# Altium PCB ATSAMD20E16_devBoard.PcbDoc
Units mm, origin at the board's own origin, x right, y up, seen from the top; angles counter-clockwise.
Board outline 26.71 x 26.71 mm, 2 copper layers (Top, Bottom), stack 1.571 mm thick; 10 components, 34 nets, 82 pads, 0 vias.
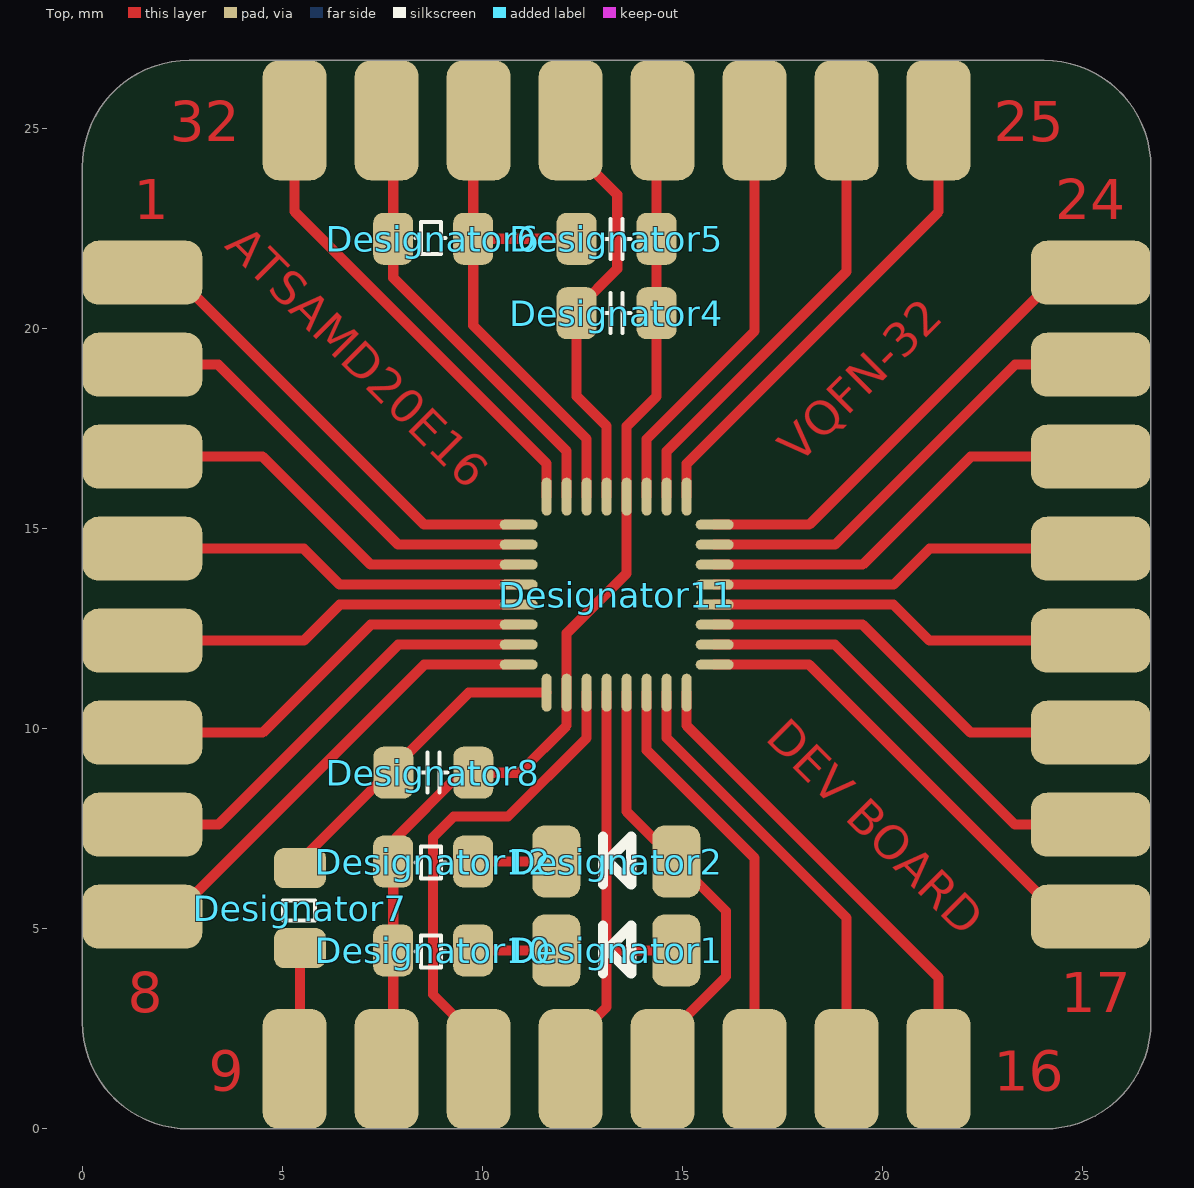
[diagram p0: Top view]
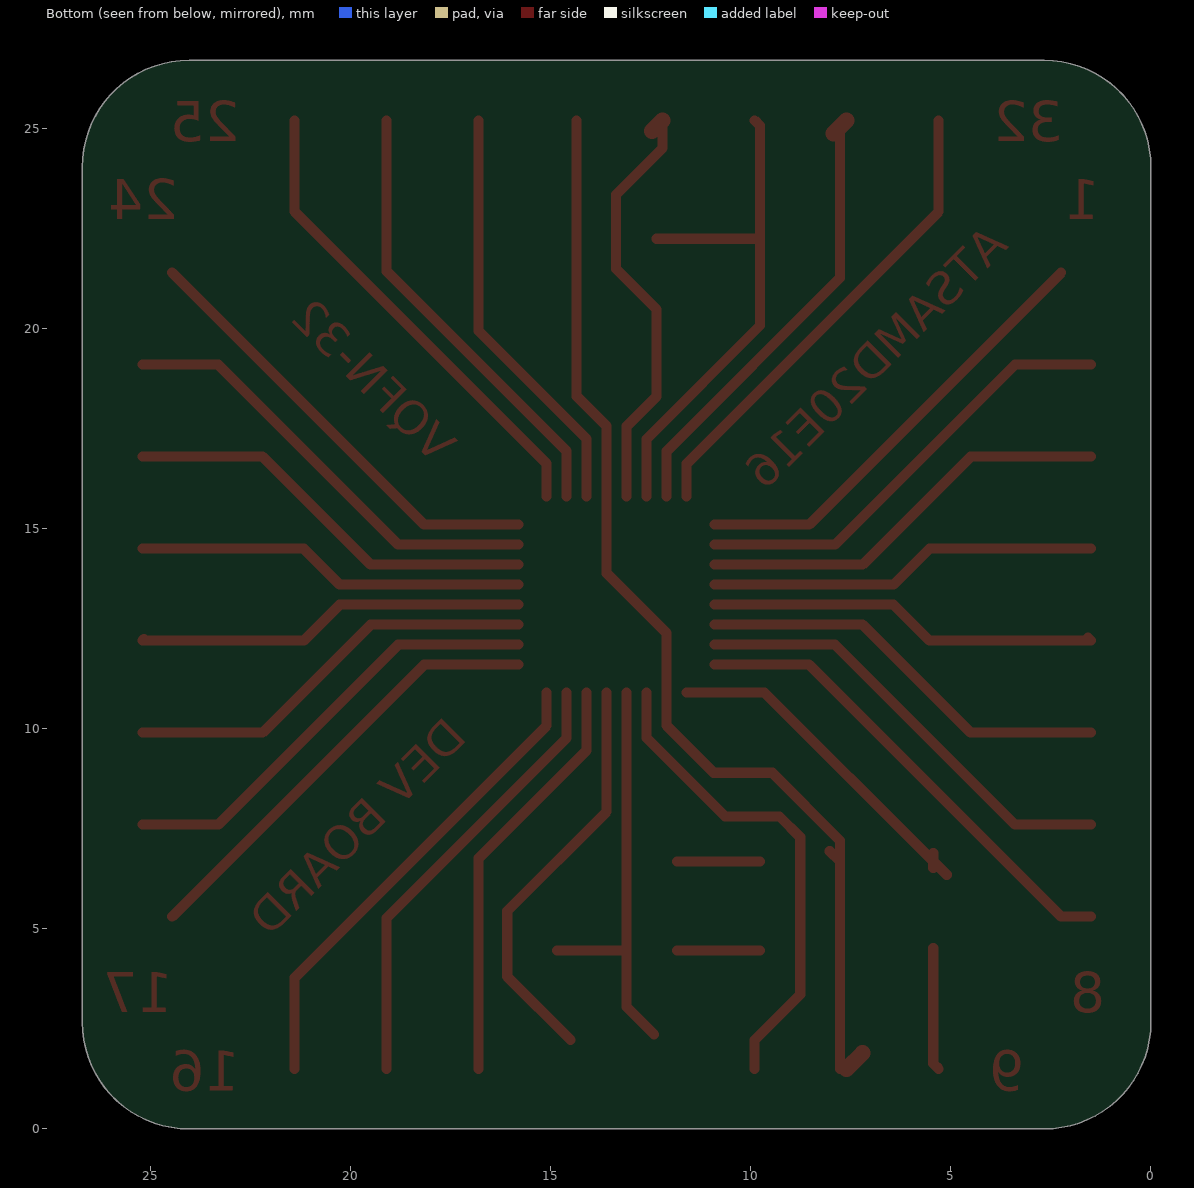
[diagram p1: Bottom view, seen from below]
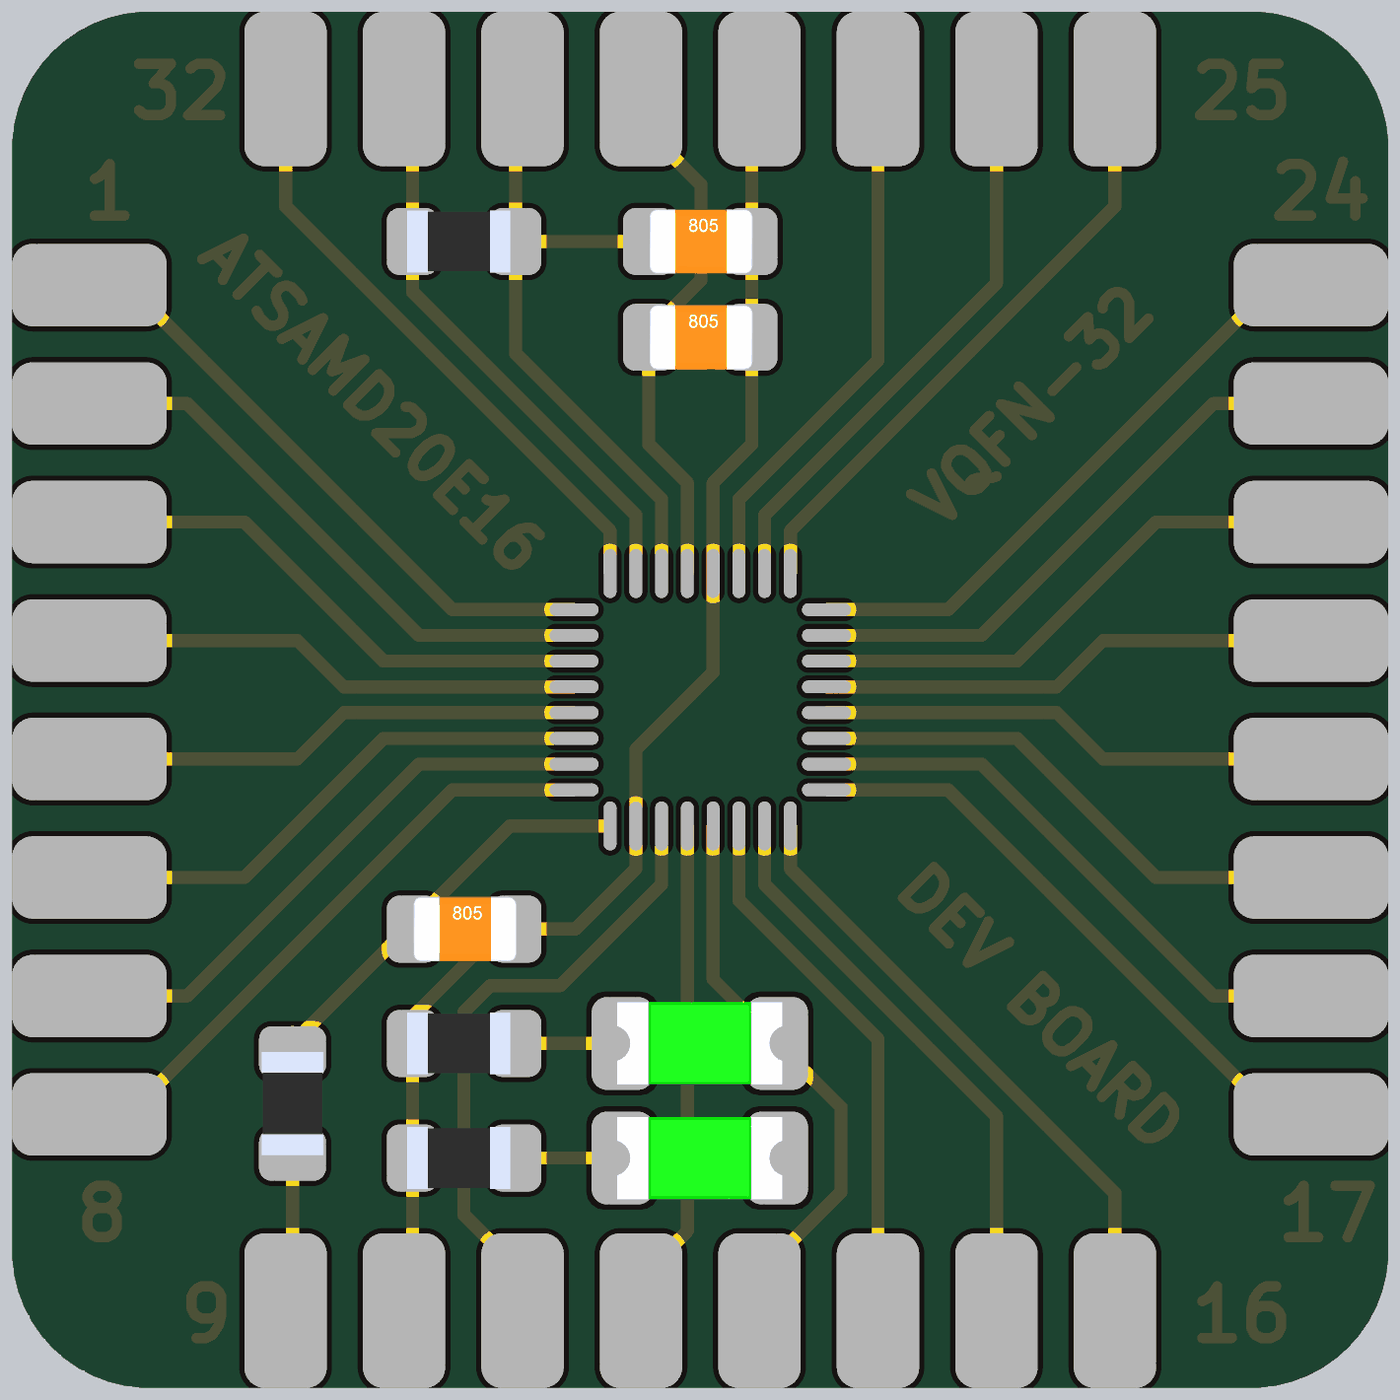
[diagram p2: 3D render of the assembled board from above, using the file's embedded part models]

## Layer stack, top to bottom
Top Solder: solder mask 0.0102, Solder Resist, Dk 3.5
Top: signal copper 0.0356
Dielectric1: core 1.5, FR-4, Dk 4.8
Bottom: signal copper 0.0356
Bottom Solder: solder mask 0.0102, Solder Resist, Dk 3.5

## Board outline
0,2.667 ccw(c2.667,2.667) 2.667,0 24.047,0 ccw(c24.047,2.667) 26.714,2.667 26.714,24.047 ccw(c24.047,24.047) 24.047,26.714 2.667,26.714 ccw(c2.667,24.047) 0,24.047

## Design rules (kind name [scope] priority, off if disabled: settings)
Clearance Clearance_1 [InPolygon] p1: gap=1 ignorepadtopadclearanceinfootprint=FALSE except(0: Arc-Hole Track-Hole SMDPad-Hole THPad-Hole Via-Hole Fill-Hole Poly-Hole Region-Hole Text-Hole)
Clearance [All] p2: gap=0.1 ignorepadtopadclearanceinfootprint=FALSE except(0: Arc-Hole Track-Hole SMDPad-Hole THPad-Hole Via-Hole Fill-Hole Poly-Hole Region-Hole Text-Hole)
PlaneClearance [All] p1: clearance=0.1
PolygonConnect [All] p1: connectstyle=Direct reliefconductorwidth=0.254 reliefentries=4 polygonreliefangle="90 Angle" airgapwidth=0.254
RoutingVias [All] p1: holewidth=0.711 width=1.27 viastyle="Through Hole" minholewidth=0.711 minwidth=1.27 maxholewidth=5 maxwidth=5
SilkToSolderMaskClearance SilkscreenOverComponentPads [IsPad] p1: minsilkscreentomaskgap=0.254 clearancetoexposedcopper=TRUE
SolderMaskExpansion [All] p1: expansion=0.102 istentingtop=FALSE
Width [All] p1: maxlimit=10 minlimit=0.254 preferedwidth=0.254
28 further rules are at their usual default settings.

## Components (designator, comment, footprint, x,y, rotation, side; value= is the part's Value field where it differs from the comment)
Designator1 "Comment" "LED 1206 GREEN" 14.849,4.461 r180 top
Designator2 "Comment" "LED 1206 GREEN" 14.849,6.685 r180 top
Designator4 "Comment" CAP0805 12.357,20.392 r0 top
Designator5 "Comment" CAP0805 12.357,22.253 r0 top
Designator6 "Comment" RES0805 7.772,22.253 r0 top
Designator7 "Comment" IND0805 5.442,4.519 r90 top
Designator8 "Comment" CAP0805 7.775,8.905 r0 top
Designator10 "Comment" RES0805 7.772,4.461 r0 top
Designator11 "Comment" ATML-QFN-32_M 13.357,13.357 r0 top
Designator12 "Comment" RES0805 7.772,6.685 r0 top

## Footprints (in the part's own frame and the unit in brackets; to place one, negate y for a bottom-side part, rotate by r counter-clockwise, add the part's x,y. Pads: shape width x height; smd on the part's side, far side on the other; paste and mask are expansions set on the pad)
ATML-QFN-32_M [mm] "QFN, 32-Leads, Body 5x5mm, Pitch 0.5mm, Thermal Pad 3.6x3.6mm, IPC Low Density"
  oval 0.95x0.25 smd: 1(-2.45,1.75) 2(-2.45,1.25) 3(-2.45,0.75) 4(-2.45,0.25) 5(-2.45,-0.25) 6(-2.45,-0.75) 7(-2.45,-1.25) 8(-2.45,-1.75) 17(2.45,-1.75) 18(2.45,-1.25) 19(2.45,-0.75) 20(2.45,-0.25) 21(2.45,0.25) 22(2.45,0.75) 23(2.45,1.25) 24(2.45,1.75)
  oval 0.25x0.95 smd: 9(-1.75,-2.45) 10(-1.25,-2.45) 11(-0.75,-2.45) 12(-0.25,-2.45) 13(0.25,-2.45) 14(0.75,-2.45) 15(1.25,-2.45) 16(1.75,-2.45) 25(1.75,2.45) 26(1.25,2.45) 27(0.75,2.45) 28(0.25,2.45) 29(-0.25,2.45) 30(-0.75,2.45) 31(-1.25,2.45) 32(-1.75,2.45)
  body extent -2.5,-2.5 2.5,2.5, height 1
CAP0805 [mm]
  rrect50% 1x1.3 smd: 1(0,0) 2(2,0)
  silkscreen extent 0.65,-0.5 1.35,0.5, body extent 0.02,-0.63 2.02,0.62, height 0.78
IND0805 [mm]
  rrect50% 1x1.3 smd: 1(0,0) 2(2,0)
  silkscreen extent 0.69,-0.38 1.19,0.42, body extent 0,-0.6 2,0.6, height 0.5
"LED 1206 GREEN" [mm]
  rrect50% 1.2x1.8 smd mask-25.4: 1(0,0) 2(3,0)
  silkscreen extent 1.13,-0.63 1.83,0.58, body extent -0.1,-0.8 3.1,0.8, height 1.1
RES0805 [mm]
  rrect50% 1x1.3 smd: 1(0,0) 2(2,0)
  silkscreen extent 0.56,-0.38 1.31,0.42, body extent -0.1,-0.6 1.9,0.6, height 0.5

## Free pads (board coordinates)
  rrect50% 3x1.6 smd: 1(1.5,21.407) 2(1.5,19.107) 3(1.5,16.807) 4(1.5,14.507) 5(1.5,12.207) 6(1.5,9.907) 7(1.5,7.607) 8(1.5,5.307) 17(25.214,5.307) 18(25.214,7.607) 19(25.214,9.907) 20(25.214,12.207) 21(25.214,14.507) 22(25.214,16.807) 23(25.214,19.107) 24(25.214,21.407)
  rrect50% 1.6x3 smd: 5(5.307,25.214) 9(5.307,1.5) 10(7.607,1.5) 11(9.907,1.5) 12(12.207,1.5) 13(14.507,1.5) 14(16.807,1.5) 15(19.107,1.5) 16(21.407,1.5) 25(21.407,25.214) 26(19.107,25.214) 27(16.807,25.214) 28(14.507,25.214) 29(12.207,25.214) 30(9.907,25.214) 31(7.607,25.214)

## Nets (pads, with @x,y where several pads share a name; then routed paths per layer and width w, separated by ;. In a path a pad name is that pad's centre, name@x,y a point inside that pad or via, vN(x,y) a via of type N, cw(c..) or ccw(c..) an arc to the next point about the centre after c; other vN are vias at no path point)
GND: Designator4.2 Designator5.2 Designator8.2 Designator10.1 Designator11.10 Designator11.28 Designator12.1 pad.10 pad.28 | length 28.2
  Top w0.254: pad.10@7.772,1.5 Designator10.1 Designator12.1 ; Designator12.1@8.028,6.941 Designator12.1 ; pad.28@14.357,25.214 Designator5.2 Designator4.2 14.357,18.315 13.607,17.565 Designator11.28 13.607,13.891 12.107,12.391 Designator11.10 12.107,10.081 10.931,8.905 Designator8.2 9.468,8.904 7.772,7.208 Designator12.1
  Top w0.4: pad.10@7.209,1.898 pad.10
LED_0: Designator1.2 Designator10.2 | length 2.1
  Top w0.254: Designator10.2 Designator1.2
LED_1: Designator2.2 Designator12.2 | length 2.1
  Top w0.254: Designator12.2 Designator2.2
PA00: Designator11.1 pad.1 | length 11.3
  Top w0.254: pad.1@2.245,21.407 8.545,15.107 Designator11.1
PA01: Designator11.2 pad.2 | length 11.3
  Top w0.254: pad.2 3.398,19.107 7.898,14.607 Designator11.2
PA02: Designator11.3 pad.3 | length 10.5
  Top w0.254: pad.3 4.507,16.807 7.207,14.107 Designator11.3
PA03: Designator11.4 pad.4 | length 9.8
  Top w0.254: pad.4 5.536,14.507 6.436,13.607 Designator11.4
PA04: Designator11.5 pad.5@1.5,12.207 | length 9.9
  Top w0.254: pad.5@1.573,12.28 1.5,12.207 5.536,12.207 6.436,13.107 Designator11.5
PA05: Designator11.6 pad.6 | length 10.5
  Top w0.254: pad.6 4.507,9.907 7.207,12.607 Designator11.6
PA06: Designator11.7 pad.7 | length 11.3
  Top w0.254: pad.7 3.398,7.607 7.898,12.107 Designator11.7
PA07: Designator11.8 pad.8 | length 12
  Top w0.254: pad.8 2.245,5.307 8.545,11.607 Designator11.8
PA08: Designator11.11 pad.11 | length 12.3
  Top w0.254: pad.11 9.907,2.222 8.767,3.362 8.767,7.291 9.285,7.809 10.643,7.809 12.607,9.773 Designator11.11
PA09: Designator1.1 Designator11.12 pad.12 | length 10.6
  Top w0.254: pad.12@12.419,2.359 13.107,3.047 13.107,4.45 ; Designator11.12 13.107,4.45 ; Designator1.1 13.118,4.461 13.107,4.45
PA10: Designator2.1 Designator11.13 pad.13 | length 10.4
  Top w0.254: Designator11.13 13.607,7.931 16.091,5.447 16.091,3.806 pad.13@14.507,2.222
PA11: Designator11.14 pad.14 | length 10.5
  Top w0.254: Designator11.14 14.107,9.465 16.807,6.765 pad.14
PA14: Designator11.15 pad.15 | length 11.3
  Top w0.254: Designator11.15 14.607,9.773 19.107,5.273 pad.15
PA15: Designator11.16 pad.16 | length 12
  Top w0.254: Designator11.16 15.107,10.081 21.407,3.781 pad.16
PA16: Designator11.17 pad.17 | length 11.3
  Top w0.254: Designator11.17 18.169,11.607 pad.17@24.469,5.307
PA17: Designator11.18 pad.18 | length 11.3
  Top w0.254: Designator11.18 18.816,12.107 23.316,7.607 pad.18
PA18: Designator11.19 pad.19 | length 10.5
  Top w0.254: Designator11.19 19.507,12.607 22.207,9.907 pad.19
PA19: Designator11.20 pad.20 | length 9.8
  Top w0.254: Designator11.20 20.278,13.107 21.178,12.207 pad.20 pad.20@25.17,12.251
PA22: Designator11.21 pad.21 | length 9.8
  Top w0.254: Designator11.21 20.278,13.607 21.178,14.507 pad.21
PA23: Designator11.22 pad.22 | length 10.5
  Top w0.254: Designator11.22 19.507,14.107 22.207,16.807 pad.22
PA24: Designator11.23 pad.23 | length 11.3
  Top w0.254: Designator11.23 18.816,14.607 23.316,19.107 pad.23
PA25: Designator11.24 pad.24 | length 11.3
  Top w0.254: Designator11.24 18.169,15.107 pad.24@24.469,21.407
PA27: Designator11.25 pad.25 | length 12
  Top w0.254: Designator11.25 15.107,16.633 21.407,22.933 pad.25
PA28: Designator11.27 pad.27 | length 10.5
  Top w0.254: Designator11.27 14.107,17.249 16.807,19.949 pad.27
PA30: Designator6.1 Designator11.31 pad.31 | length 11.3
  Top w0.254: pad.31@7.772,24.886 Designator6.1 7.772,21.276 12.107,16.941 Designator11.31
  Top w0.4: pad.31 pad.31@7.935,24.886
PA31: Designator11.32 pad.5@5.307,25.214 | length 12
  Top w0.254: pad.5@5.307,25.214 5.307,22.933 11.607,16.633 Designator11.32
RESET: Designator11.26 pad.26 | length 11.3
  Top w0.254: Designator11.26 14.607,16.941 19.107,21.441 pad.26
VDDANA: Designator7.2 Designator8.1 Designator11.9 | length 8.8
  Top w0.254: Designator7.2@5.105,6.353 Designator7.2@5.442,6.69 ; Designator7.2 Designator7.2@5.442,6.69 ; Designator7.2@5.442,6.898 Designator7.2@5.442,6.69 ; Designator11.9 9.659,10.907 Designator7.2@5.442,6.69
VDDANAIN: Designator7.1 pad.9 | length 3.1
  Top w0.254: pad.9 5.442,1.635 Designator7.1
VDDCORE: Designator4.1 Designator11.29 pad.29 | length 11
  Top w0.254: pad.29 12.207,24.522 13.372,23.357 13.372,21.5 12.357,20.485 Designator4.1 12.357,18.315 13.107,17.565 Designator11.29
  Top w0.4: pad.29 pad.29@12.468,24.953
VDDIN: Designator5.1 Designator6.2 Designator11.30 pad.30 | length 13.2
  Top w0.254: pad.30 9.772,25.079 Designator6.2 ; Designator5.1 Designator6.2 ; Designator11.30 12.607,17.249 9.772,20.084 Designator6.2

## Other copper
Top:
  text "32" at 2.188,24.694 h1
  text "25" at 22.783,24.694 h1
  text "1" at 1.284,22.745 h1
  text "24" at 24.321,22.745 h1
  text "ATSAMD20E16" at 3.53,22.05 h0.85 r315
  text "VQFN-32" at 17.907,16.59 h0.85 r45
  text "DEV BOARD" at 17.048,9.741 h0.85 r315
  text "8" at 1.138,2.913 h1
  text "17" at 24.46,2.913 h1
  text "9" at 3.161,0.958 h1
  text "16" at 22.783,0.958 h1

## Silkscreen, mask and mechanical layers (free items; w line width, h text height)
Outline:
  lines w0: 11.747,11.747 11.747,14.621 12.093,14.967 14.967,14.967 14.967,11.747 11.747,11.747
  lines w0.1: 0,2.667 ccw(c2.667,2.667) 2.667,0 24.047,0 ccw(c24.047,2.667) 26.714,2.667 26.714,24.047 ccw(c24.047,24.047) 24.047,26.714 2.667,26.714 ccw(c2.667,24.047) 0,24.047 0,2.667